# Altium PCB A8_v0.PcbDoc
Units mil, origin at the board's own origin, x right, y up, seen from the top; angles counter-clockwise.
Board outline 1387.98 x 1387.98 mil, 2 copper layers (Top Layer, Bottom Layer); 5 components, 23 nets, 58 pads, 10 vias.
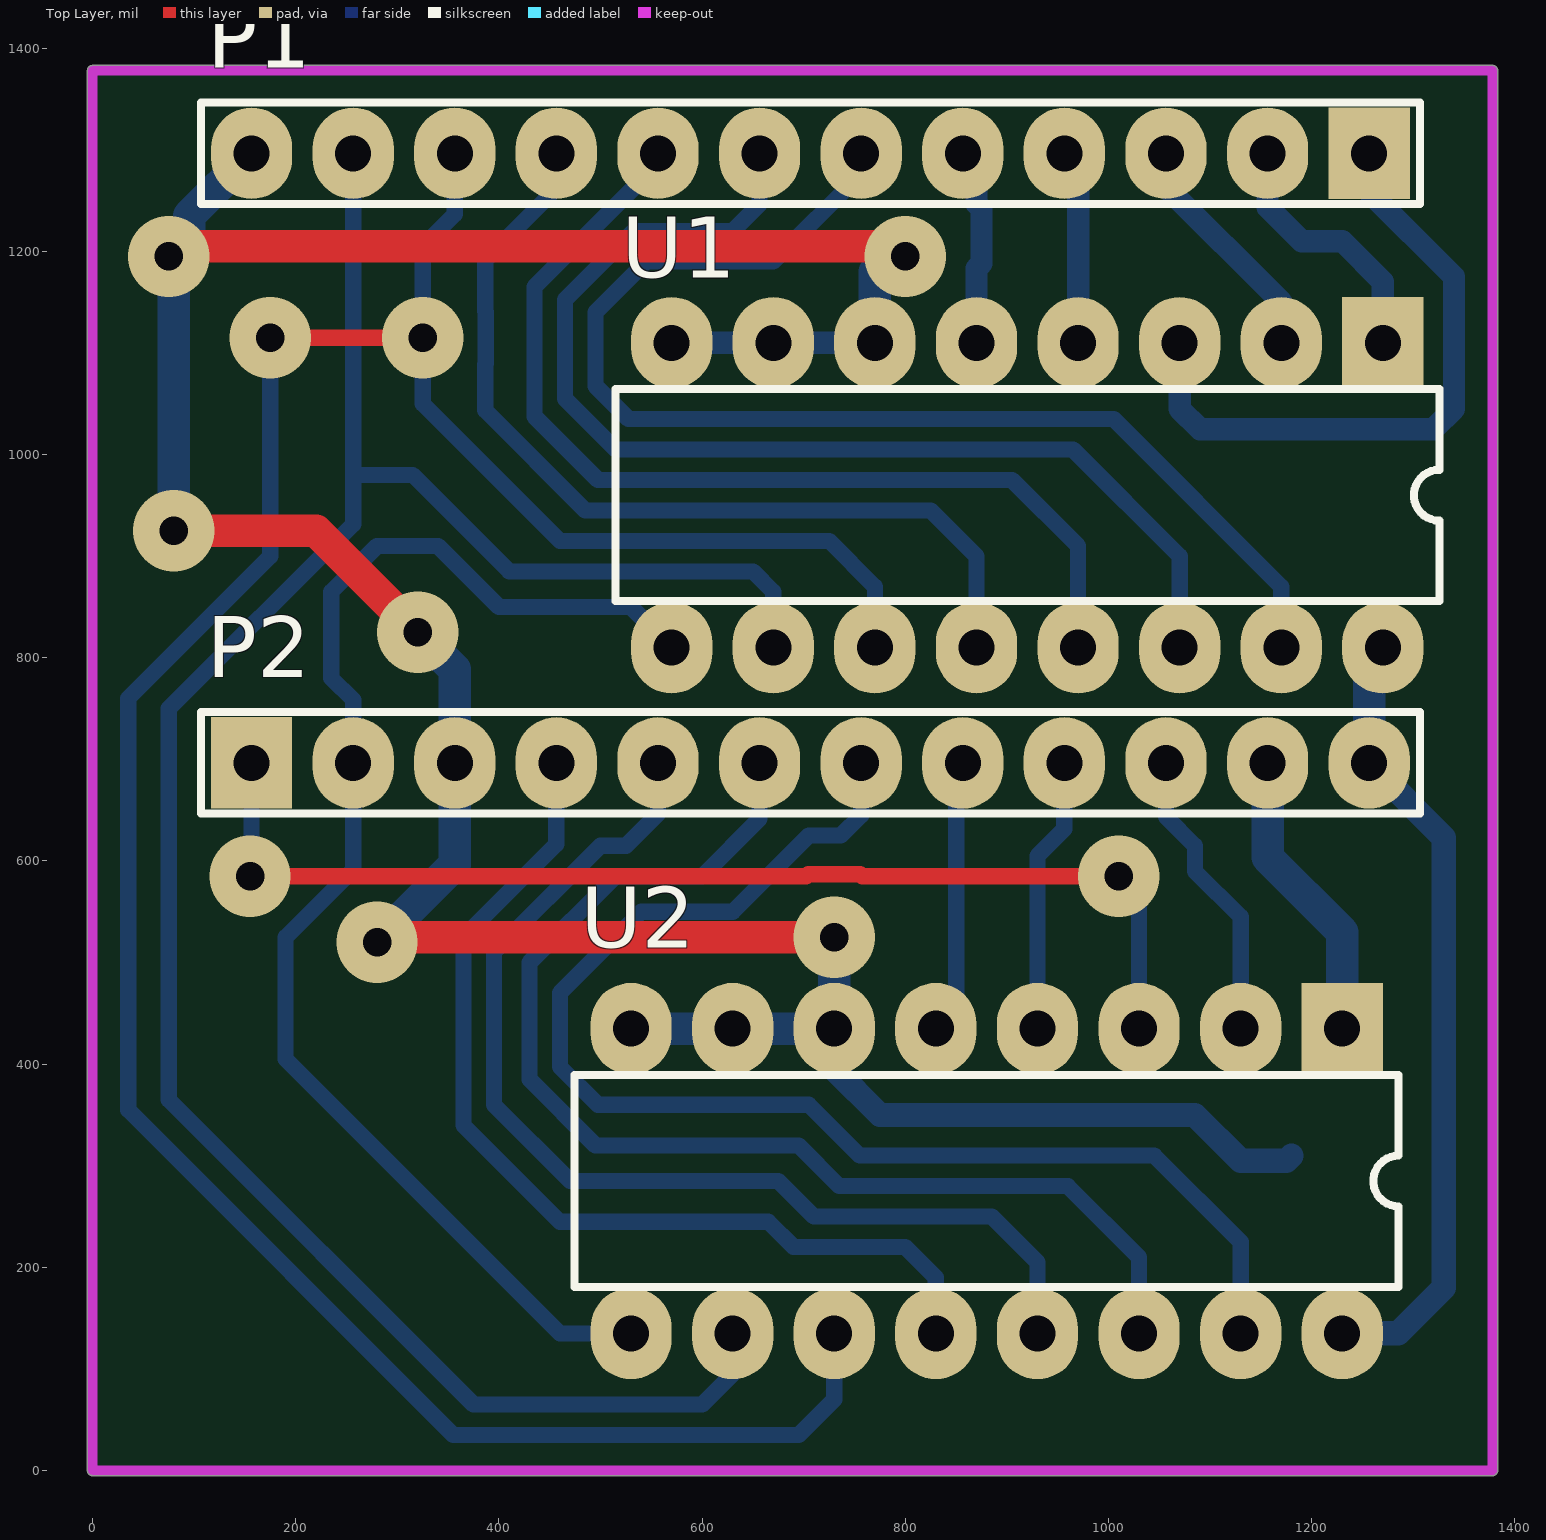
[diagram p0: Top Layer view]
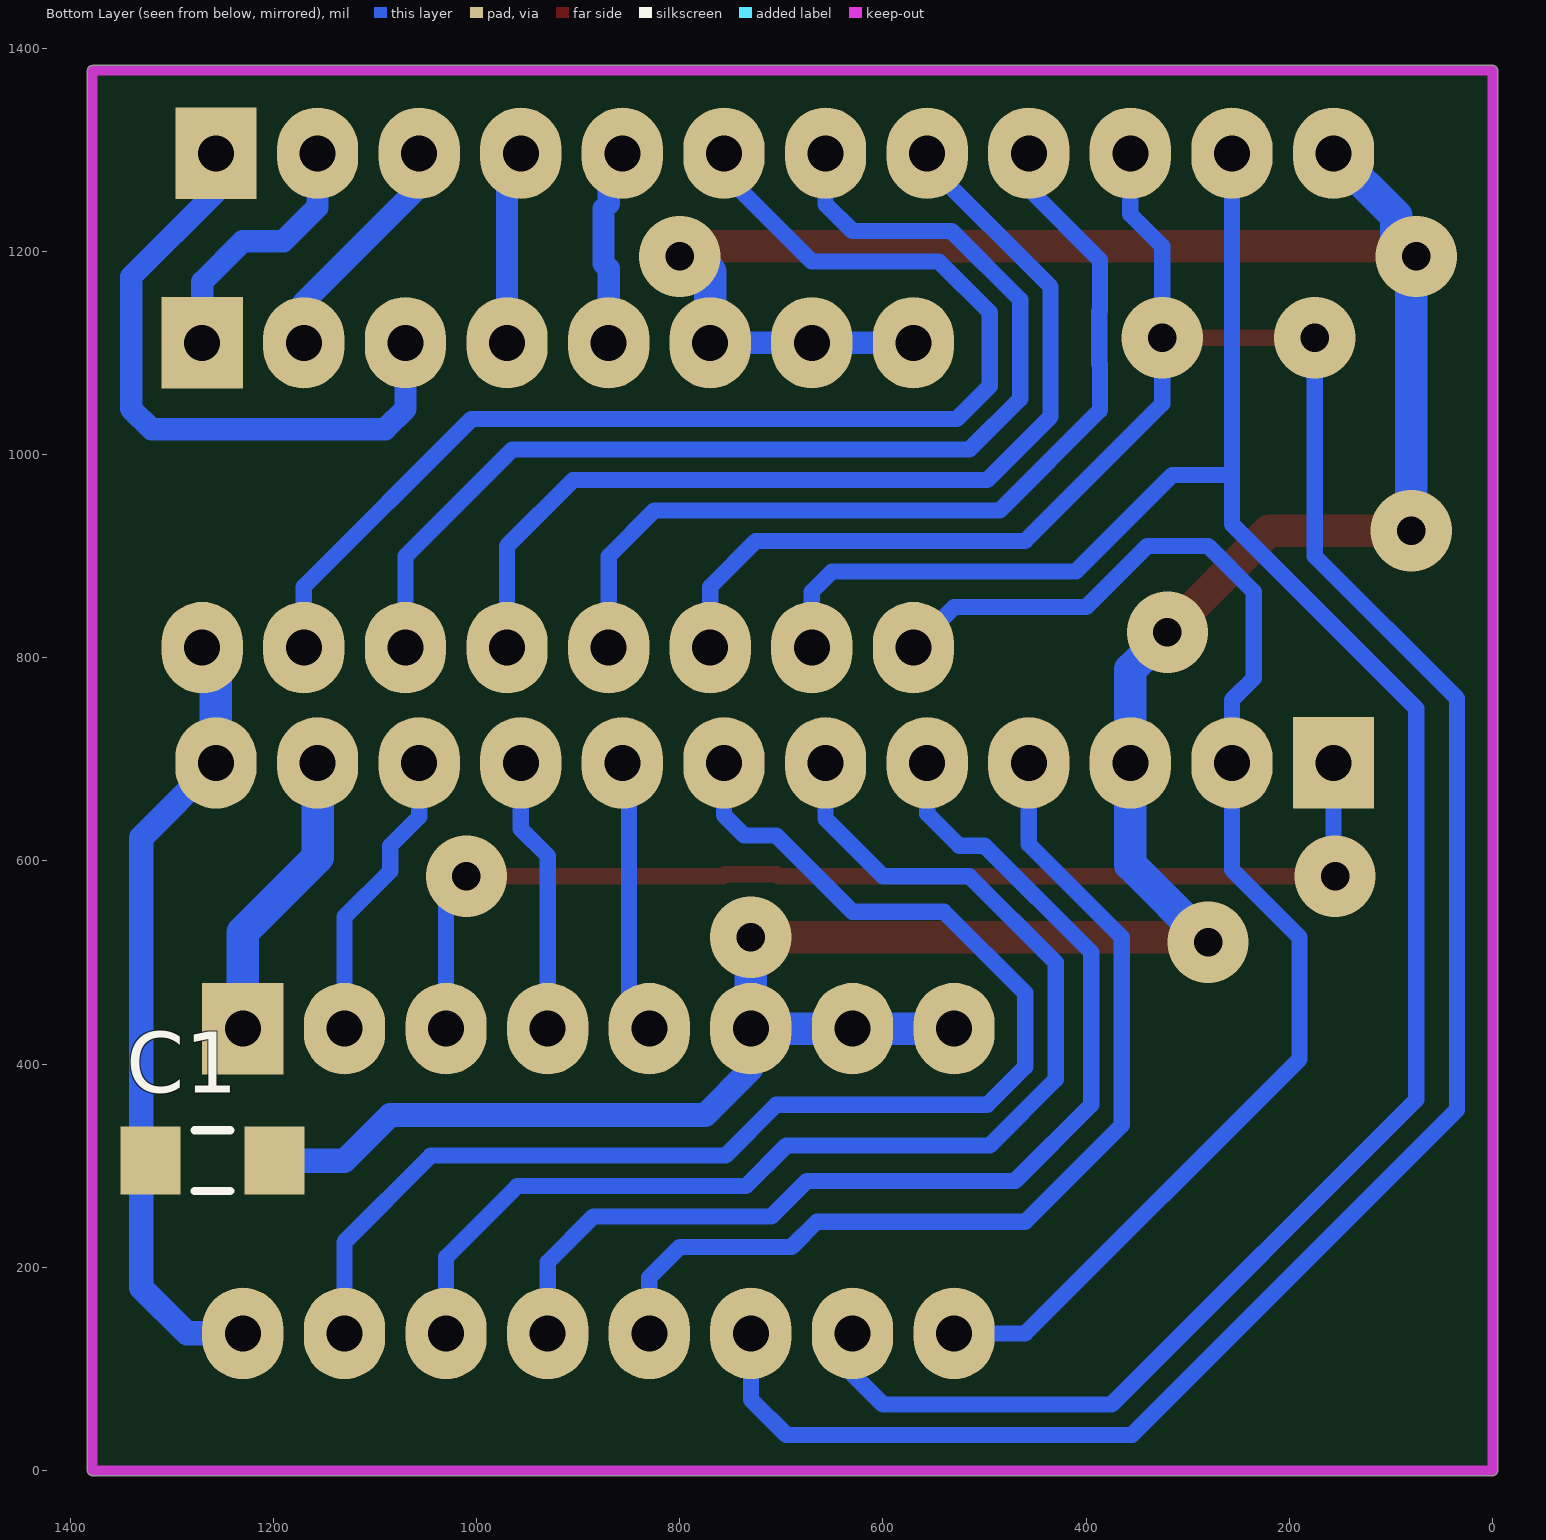
[diagram p1: Bottom Layer view, seen from below]

## Layer stack, top to bottom
Top Solder: solder mask 0.4, Solder Resist, Dk 3.5
Top Layer: signal copper 1.4
Dielectric 1: dielectric 12.6, FR-4, Dk 4.8
Bottom Layer: signal copper 1.4
Bottom Solder: solder mask 0.4, Solder Resist, Dk 3.5

## Board outline
0,-5.01 cw(c0,0) -5.01,0 -5.01,1377.95 cw(c0,1377.95) 0,1382.97 1377.95,1382.97 cw(c1377.95,1377.95) 1382.97,1377.95 1382.97,0 cw(c1377.95,0) 1377.95,-5.01

## Design rules (kind name [scope] priority, off if disabled: settings)
Clearance [All] p1: gap=14
PolygonConnect [All] p1: connectstyle=Relief reliefconductorwidth=10 reliefentries=4 polygonreliefangle="90 Angle" airgapwidth=10
RoutingVias [All] p1: holewidth=28 width=90 viastyle="Through Hole" minholewidth=28 minwidth=60 maxholewidth=28 maxwidth=110
SolderMaskExpansion [All] p1: expansion=4
Width [All] p1: maxlimit=64 minlimit=16 preferedwidth=32
29 further rules are at their usual default settings.

## Components (designator, comment, footprint, x,y, rotation, side; value= is the part's Value field where it differs from the comment)
C1 ".1uF 1206" C1206_W 1260,305 r0 bottom
P1 "Header 12" HDR1X12 1256.5,1296.5 r180 top
P2 "Header 12" HDR1X12 156.5,696.5 r0 top
U1 "HCF4051BEY" DIP16 920,960 r180 top
U2 "HCF4051BEY" DIP16 880,285 r180 top

## Footprints (in the part's own frame and the unit in brackets; to place one, negate y for a bottom-side part, rotate by r counter-clockwise, add the part's x,y. Pads: shape width x height; smd on the part's side, far side on the other; paste and mask are expansions set on the pad)
C1206_W [mm] "Chip Capacitor, Body 3.2x1.6mm, IPC High Density"
  rect 1.5x1.7 smd: 1(-1.55,0) 2(1.55,0)
  silkscreen extent -0.44,-0.76 0.44,0.76, body extent -1.6,-0.8 1.6,0.8, height 1
DIP16 [mil] "DIP; 16 Leads; Row Spacing 7.62 mm; Pitch 2.54 mm"
  rect 80x90 hole 35.43: 1(-350,-150)
  oval 80x90 hole 35.43: 2(-250,-150) 3(-150,-150) 4(-50,-150) 5(50,-150) 6(150,-150) 7(250,-150) 8(350,-150) 9(350,150) 10(250,150) 11(150,150) 12(50,150) 13(-50,150) 14(-150,150) 15(-250,150) 16(-350,150)
  silkscreen extent -406,-104 406,104
HDR1X12 [mil] "Connector; Header; 12 Position"
  rect 80x90 hole 35.43: 1(0,0)
  oval 80x90 hole 35.43: 2(100,0) 3(200,0) 4(300,0) 5(400,0) 6(500,0) 7(600,0) 8(700,0) 9(800,0) 10(900,0) 11(1000,0) 12(1100,0)
  silkscreen extent -50,-50 1150,50

## Part data
C1: library part Cap, "Capacitor"
P1 P2: "Header, 12-Pin"
U1 U2: "Analog Multiplexer/Demultiplexer"

## Via types
v1: diameter 80, hole 28, Top Layer to Bottom Layer, 10 vias

## Nets (pads, with @x,y where several pads share a name; then routed paths per layer and width w, separated by ;. In a path a pad name is that pad's centre, name@x,y a point inside that pad or via, vN(x,y) a via of type N, cw(c..) or ccw(c..) an arc to the next point about the centre after c; other vN are vias at no path point)
BAT: P2.7 U2.15 | length 1324.5
  Bottom Layer w16: P2.7 756.5,645 736.5,625 705,625 630,550 540,550 460,470 460,397.43 497.43,360 705,360 755,310 1045,310 1130,225 U2.15
BTSBATT: P2.5 U2.13 | length 1087.2
  Bottom Layer w16: P2.5 556.5,646.5 525,615 500,615 395,510 395,360 470,285 675,285 710,250 885,250 930,205 U2.13
COMM: P1.1 U1.3 | length 637.7
  Bottom Layer w22: U1.3 1070,1045 1090,1025 1320,1025 1340,1045 1340,1175 1256.5,1258.5 P1.1
DG-B_: P1.5 U1.5 | length 177.1
  Bottom Layer w22: U1.5 870,1183.08 875,1188.08 875,1241.92 870,1246.92 P1.5@870,1282.99
DG-R_: P1.7 U1.14 | length 1137.1
  Bottom Layer w16: P1.7 656.5,1246.5 630,1220 532.57,1220 465,1152.43 465,1055 515,1005 965,1005 1070,900 U1.14
DG-Y_: P1.6 U1.15 | length 1227.4
  Bottom Layer w16: P1.6 756.5,1276.5 670,1190 545,1190 495,1140 495,1067.43 527.43,1035 1005,1035 1170,870 U1.15
EB-B_: P1.2 U1.1 | length 256.9
  Bottom Layer w22: P1.2 1156.5,1243.5 1190,1210 1230,1210 1270,1170 U1.1
EB-R_: P1.4 U1.4 | length 173
  Bottom Layer w22: U1.4 P1.4@970,1282.99
EB-Y_: P1.3 U1.2 | length 233.5
  Bottom Layer w22: P1.3 1056.5,1263.5 1170,1150 U1.2
EMSTP: P2.8 U2.5 | length 272.5
  Bottom Layer w16: U2.5 850,455 850,690 P2.8
FLDIR: P2.4 U2.12 | length 976.5
  Bottom Layer w16: P2.4 456.5,616.5 365,525 365,340 460,245 665,245 690,220 800,220 830,190 U2.12
FLG: P2.6 U2.14 | length 1202.6
  Bottom Layer w16: P2.6 656.5,641.5 600,585 515,585 430,500 430,385 495,320 695,320 735,280 960,280 1030,210 U2.14
FLT1: P1.8 U1.13 | length 997.2
  Bottom Layer w16: P1.8 556.5,1286.5 435,1165 435,1037.43 497.43,975 905,975 970,910 U1.13
GND: C1.1 P1.12 P2.3 U1.6 U1.7 U1.8 U2.6 U2.7 U2.8 | length 3395.6
  Top Layer w32: v1(75,1195) 85,1195 95,1205 805,1205 800,1200 v1(800,1195) ; v1(80,925) 220,925 v1(320,825) ; v1(280,520) 285,525 v1(730,525)
  Bottom Layer w22: U1.8 U1.7 U1.6
  Bottom Layer w24: U2.6 730,395 775,350 1085,350 1130,305 1175,305 C1.1@1180,310
  Bottom Layer w32: v1(80,925) 80,1190 95,1205 95,1235 P1.12 ; v1(280,520) 356.5,596.5 P2.3 356.5,788.5 v1(320,825) ; U2.8 U2.7 U2.6 v1(730,525) ; U1.6 770,1180 775,1180 v1@805,1210 ; v1(800,1195) 800,1200 805,1205 v1@805,1210 ; v1@810,1215 v1@805,1210
HT: P1.9 U1.12 | length 915.3
  Bottom Layer w16: P1.9 456.5,1261.5 386.5,1191.5 386.5,1141.19 387,1140.68 387,1089.32 386.5,1088.81 386.5,1043.5 485,945 825,945 870,900 U1.12
LLOP: P2.10 U2.2 | length 291.9
  Bottom Layer w16: P2.10 1056.5,643.5 1085,615 1085,590 1130,545 U2.2
REMOT: P2.9 U2.4 | length 272.5
  Bottom Layer w16: U2.4 930,605 956.5,631.5 P2.9
RSTART: P2.11 U2.1 | length 291.9
  Bottom Layer w32: P2.11 1156.5,603.5 1230,530 U2.1
S0: P1.10 U1.11 U2.11 | length 2714.1
  Top Layer w16: v1(175,1115) v1(325,1115)
  Bottom Layer w16: v1(175,1115) 175,900 35,760 35,355 355,35 695,35 730,70 U2.11 ; P1.10 356.5,1236.5 325,1205 v1(325,1115) 325,1050 460,915 725,915 770,870 U1.11
S1: P1.11 U1.10 U2.10 | length 2254.5
  Bottom Layer w16: P1.11 256.5,980 ; U2.10 630,95 600,65 375,65 75,365 75,750 256.5,931.5 256.5,980 ; U1.10 670,865 650,885 410,885 315,980 256.5,980
S2: P2.2 U1.9 U2.9 | length 1343.3
  Bottom Layer w16: U2.9 460,135 190,405 190,525 256.5,591.5 P2.2 256.5,758.5 235,780 235,865 280,910 340,910 400,850 530,850 U1.9
S3: P2.1 U2.3 | length 1125
  Top Layer w16: v1(155,585) 702.32,585 704.32,587 755.68,587 757.68,585 v1(1010,585)
  Bottom Layer w16: P2.1 156.5,595 155,595 v1@160,590 ; v1(1010,585) 1030,565 U2.3
VCC: C1.2 P2.12 U1.16 U2.16 | length 784.7
  Bottom Layer w24: U2.16 1285,135 1330,180 1330,622.99 P2.12
  Bottom Layer w32: P2.12 1256.5,796.5 U1.16

## Keep-outs
Keep-Out Layer:
  lines w10: 0,0 0,1377.95 1377.95,1377.95 1377.95,0 0,0